# EAGLE board full1.2 (EAGLE 6.6.0)

Size 91.44 x 41.91 mm. Coordinates in mm from the lower left corner, seen from the top.
Outline: 0,0 91.44,0 91.44,0.64 91.44,31.75 60.33,31.75 60.33,41.91 0,41.91 0,0.64 0,0
Outline: circle at 15.88,10.16 radius 3.17
Outline: circle at 15.88,35.56 radius 3.17
Outline: circle at 55.56,35.56 radius 3.17
Outline: circle at 55.56,10.16 radius 3.17
Copper layers (1*16): Top 0.035mm / dielectric 1.5mm / Bottom 0.035mm
Design rules "default": minimum track width 10mil, minimum drill 24mil, track to track 8mil, track to pad 8mil, pad to pad 8mil, via to via 8mil, smd to smd 8mil, copper to edge 40mil, drill to drill 8mil, minimum pad ring 10mil, minimum via ring 8mil, stop-mask expansion 4mil, vias tented up to drill 0mil, thermal gap 10mil

## Footprints (pad centres in the part's own frame; a part is rotated, then mirrored left to right if it is on the bottom)
DIL16 = drill 0.813 long: 1 -8.89,-3.81; 2 -6.35,-3.81; 3 -3.81,-3.81; 4 -1.27,-3.81; 5 1.27,-3.81; 6 3.81,-3.81; 7 6.35,-3.81; 8 8.89,-3.81; 9 8.89,3.81; 10 6.35,3.81; 11 3.81,3.81; 12 1.27,3.81; 13 -1.27,3.81; 14 -3.81,3.81; 15 -6.35,3.81; 16 -8.89,3.81
SQUARE = drill 0.7 square: 1 0,0
OCTOGON = drill 0.7 octagon: 1 0,0
LONG = drill 0.7 long: 1 0,0
050X030_050_3 = drill 0.7: 1 -3.81,0; 2 3.81,0
DO35-2 = drill 0.9: A 2.54,0 | drill 0.9 square: C -2.54,0
1X05 = drill 1.016 long: 1 -5.08,0; 2 -2.54,0; 3 0,0; 4 2.54,0; 5 5.08,0
1X04 = drill 1.016 long: 1 -3.81,0; 2 -1.27,0; 3 1.27,0; 4 3.81,0
1X02 = drill 1.016 long: 1 -1.27,0; 2 1.27,0
1X01 = drill 1.016 octagon: 1 0,0
N20 = drill 0.813 long: 1 -11.435,-3.81; 2 -8.895,-3.81; 3 -6.355,-3.81; 4 -3.815,-3.81; 5 -1.275,-3.81; 6 1.265,-3.81; 7 3.805,-3.81; 8 6.345,-3.81; 9 8.885,-3.81; 10 11.425,-3.81; 11 11.425,3.81; 12 8.885,3.81; 13 6.345,3.81; 14 3.805,3.81; 15 1.265,3.81; 16 -1.275,3.81; 17 -3.815,3.81; 18 -6.355,3.81; 19 -8.895,3.81; 20 -11.435,3.81
TO92- = drill 0.7 octagon: 1 2.54,0; 2 0,0; 3 -2.54,0
R0207/3 = drill 0.7: 1 -3.81,0; 2 3.81,0

## Placement (x,y rotation side)
595LSB  74LS595N  [DIL16]  -52.07,6.35 0 top  (outside the outline)
595MSB  74LS595N  [DIL16]  -74.93,6.35 0 top  (outside the outline)
_RST  [SQUARE]  -64.77,83.82 0 top  (outside the outline)
A_AN  [SQUARE]  -35.56,81.28 0 top  (outside the outline)
A_R  [OCTOGON]  -48.26,88.9 0 top  (outside the outline)
AGND  [SQUARE]  -46.99,78.74 0 top  (outside the outline)
B_AN  [SQUARE]  -43.18,81.28 0 top  (outside the outline)
B_R  [OCTOGON]  -54.61,88.9 0 top  (outside the outline)
BACK  [OCTOGON]  -64.77,78.74 0 top  (outside the outline)
BATT+  [LONG]  -82.55,68.58 0 top  (outside the outline)
BATT-  [LONG]  -50.8,73.66 0 top  (outside the outline)
C1  100n  [050X030_050_3]  -76.2,39.37 0 top  (outside the outline)
C2  100n  [050X030_050_3]  -17.78,45.72 0 top  (outside the outline)
C3  100n  [050X030_050_3]  -27.94,45.72 0 top  (outside the outline)
C4  100n  [050X030_050_3]  -38.1,45.72 0 top  (outside the outline)
C5  100n  [050X030_050_3]  -48.26,45.72 0 top  (outside the outline)
D1  1N4148-2  [DO35-2]  -64.77,45.72 0 top  (outside the outline)
D2  1N4148-2  [DO35-2]  -74.93,45.72 0 top  (outside the outline)
D3  1N4148-2  [DO35-2]  -19.05,50.8 0 top  (outside the outline)
D4  1N4148-2  [DO35-2]  -29.21,50.8 0 top  (outside the outline)
D4_A  [SQUARE]  -72.39,83.82 0 top  (outside the outline)
D4_B  [SQUARE]  -80.01,83.82 0 top  (outside the outline)
D5  1N4148-2  [DO35-2]  -39.37,50.8 0 top  (outside the outline)
D5_A  [SQUARE]  -19.05,86.36 0 top  (outside the outline)
D5_B  [SQUARE]  -26.67,86.36 0 top  (outside the outline)
D6  1N4148-2  [DO35-2]  -49.53,50.8 0 top  (outside the outline)
D7  1N4148-2  [DO35-2]  -59.69,50.8 0 top  (outside the outline)
D8  1N4148-2  [DO35-2]  -69.85,50.8 0 top  (outside the outline)
D9  1N4148-2  [DO35-2]  -80.01,50.8 0 top  (outside the outline)
D10  1N4148-2  [DO35-2]  -19.05,55.88 0 top  (outside the outline)
D11  1N4148-2  [DO35-2]  -29.21,55.88 0 top  (outside the outline)
D12  1N4148-2  [DO35-2]  -39.37,55.88 0 top  (outside the outline)
D_AN  [SQUARE]  -20.32,81.28 0 top  (outside the outline)
D_DN  [SQUARE]  -73.66,78.74 0 top  (outside the outline)
D_LF  [OCTOGON]  -49.53,86.36 0 top  (outside the outline)
D_R  [OCTOGON]  -26.67,88.9 0 top  (outside the outline)
D_RT  [OCTOGON]  -50.8,81.28 0 top  (outside the outline)
D_UP  [OCTOGON]  -27.94,81.28 0 top  (outside the outline)
E1_AN  [SQUARE]  -66.04,76.2 0 top  (outside the outline)
E1_R  [OCTOGON]  -34.29,86.36 0 top  (outside the outline)
E6_AN  [SQUARE]  -74.93,76.2 0 top  (outside the outline)
E6_R  [SQUARE]  -41.91,86.36 0 top  (outside the outline)
G_AN  [SQUARE]  -82.55,78.74 0 top  (outside the outline)
G_R  [OCTOGON]  -80.01,86.36 0 top  (outside the outline)
GND  [SQUARE]  -57.15,86.36 0 top  (outside the outline)
GND_  [OCTOGON]  -55.88,78.74 0 top  (outside the outline)
JP1  [1X05]  -45.72,31.75 0 top  (outside the outline)
JP2  [1X05]  -59.69,31.75 0 top  (outside the outline)
JP3  [1X05]  -73.66,31.75 0 top  (outside the outline)
JP4  [1X05]  -20.32,38.1 0 top  (outside the outline)
JP5  [1X05]  -34.29,38.1 0 top  (outside the outline)
JP6  [1X04]  -46.99,38.1 0 top  (outside the outline)
JP7  [1X04]  -58.42,38.1 0 top  (outside the outline)
JP8  [1X02]  -67.31,38.1 0 top  (outside the outline)
JP9  [1X01]  -55.88,43.18 0 top  (outside the outline)
M_F1  [OCTOGON]  -58.42,81.28 0 top  (outside the outline)
M_F2  [OCTOGON]  -66.04,81.28 0 top  (outside the outline)
M_F3  [OCTOGON]  -73.66,81.28 0 top  (outside the outline)
M_F4  [SQUARE]  -81.28,81.28 0 top  (outside the outline)
M_F5  [OCTOGON]  -19.05,83.82 0 top  (outside the outline)
M_F6  [OCTOGON]  -26.67,83.82 0 top  (outside the outline)
M_F7  [OCTOGON]  -34.29,83.82 0 top  (outside the outline)
M_F8  [SQUARE]  -41.91,83.82 0 top  (outside the outline)
M_F9  [OCTOGON]  -49.53,83.82 0 top  (outside the outline)
M_F10  [OCTOGON]  -83.82,76.2 0 top  (outside the outline)
M_F11  [OCTOGON]  -20.32,78.74 0 top  (outside the outline)
M_F12  [OCTOGON]  -29.21,78.74 0 top  (outside the outline)
MSP430G2553  G2XX3---N20  [N20]  -26.67,6.35 0 top  (outside the outline)
MUX05  [SQUARE]  -71.12,73.66 0 top  (outside the outline)
MUX07  [SQUARE]  -80.01,73.66 0 top  (outside the outline)
MUX09  [SQUARE]  -21.59,76.2 0 top  (outside the outline)
MUX_08  [SQUARE]  -21.59,73.66 0 top  (outside the outline)
MUX_16  [SQUARE]  -31.75,73.66 0 top  (outside the outline)
MUX_17  [SQUARE]  -41.91,73.66 0 top  (outside the outline)
MUXA  4051N  [DIL16]  -24.13,22.86 0 top  (outside the outline)
MUXB  4051N  [DIL16]  -46.99,22.86 0 top  (outside the outline)
ORNG  [OCTOGON]  -38.1,78.74 0 top  (outside the outline)
POT_A  [OCTOGON]  -30.48,76.2 0 top  (outside the outline)
POT_B  [SQUARE]  -39.37,76.2 0 top  (outside the outline)
Q1  2N3904  [TO92-]  -64.77,20.32 0 top  (outside the outline)
Q2  2N3904  [TO92-]  -73.66,20.32 0 top  (outside the outline)
Q3  2N3904  [TO92-]  -82.55,20.32 0 top  (outside the outline)
Q4  2N3904  [TO92-]  -17.78,33.02 0 top  (outside the outline)
Q5  2N3904  [TO92-]  -26.67,33.02 0 top  (outside the outline)
Q6  2N3904  [TO92-]  -35.56,33.02 0 top  (outside the outline)
R1  300k  [R0207/3]  -48.26,55.88 0 top  (outside the outline)
R2  1k  [R0207/3]  -58.42,55.88 0 top  (outside the outline)
R3  300k  [R0207/3]  -68.58,55.88 0 top  (outside the outline)
R4  1k  [R0207/3]  -78.74,55.88 0 top  (outside the outline)
R5  300k  [R0207/3]  -17.78,60.96 0 top  (outside the outline)
R6  1k  [R0207/3]  -27.94,60.96 0 top  (outside the outline)
R7  300k  [R0207/3]  -38.1,60.96 0 top  (outside the outline)
R8  1k  [R0207/3]  -48.26,60.96 0 top  (outside the outline)
R9  300k  [R0207/3]  -58.42,60.96 0 top  (outside the outline)
R10  1k  [R0207/3]  -68.58,60.96 0 top  (outside the outline)
R11  300k  [R0207/3]  -78.74,60.96 0 top  (outside the outline)
R12  1k  [R0207/3]  -17.78,66.04 0 top  (outside the outline)
R13  30k  [R0207/3]  -27.94,66.04 0 top  (outside the outline)
R14  30k  [R0207/3]  -38.1,66.04 0 top  (outside the outline)
R15  30k  [R0207/3]  -48.26,66.04 0 top  (outside the outline)
R16  30k  [R0207/3]  -58.42,66.04 0 top  (outside the outline)
R17  30k  [R0207/3]  -68.58,66.04 0 top  (outside the outline)
R18  30k  [R0207/3]  -78.74,66.04 0 top  (outside the outline)
R19  30k  [R0207/3]  -17.78,71.12 0 top  (outside the outline)
R20  30k  [R0207/3]  -27.94,71.12 0 top  (outside the outline)
R21  30k  [R0207/3]  -38.1,71.12 0 top  (outside the outline)
R22  30k  [R0207/3]  -48.26,71.12 0 top  (outside the outline)
R23  30k  [R0207/3]  -58.42,71.12 0 top  (outside the outline)
R24  30k  [R0207/3]  -68.58,71.12 0 top  (outside the outline)
RXD  [SQUARE]  -64.77,86.36 0 top  (outside the outline)
SCL  [SQUARE]  -60.96,88.9 0 top  (outside the outline)
SDA  [OCTOGON]  -19.05,88.9 0 top  (outside the outline)
SIDE_B  [OCTOGON]  -62.23,73.66 0 top  (outside the outline)
START  [OCTOGON]  -48.26,76.2 0 top  (outside the outline)
TEST  [OCTOGON]  -57.15,83.82 0 top  (outside the outline)
TXD  [OCTOGON]  -34.29,88.9 0 top  (outside the outline)
VDD  [OCTOGON]  -72.39,86.36 0 top  (outside the outline)
VSS  [OCTOGON]  -41.91,88.9 0 top  (outside the outline)
X  [OCTOGON]  -66.04,88.9 0 top  (outside the outline)
X_BUT  [OCTOGON]  -57.15,76.2 0 top  (outside the outline)
Y  [SQUARE]  -71.12,88.9 0 top  (outside the outline)

## Library data of the parts
595LSB 595MSB = 74xx-us
_RST A_AN A_R AGND B_AN B_R BACK BATT+ BATT- D4_A D4_B D5_A D5_B D_AN D_DN D_LF D_R D_RT D_UP E1_AN E1_R E6_AN E6_R G_AN G_R GND GND_ M_F1-M_F12 MUX05 MUX07 MUX09 MUX_08 MUX_16 MUX_17 ORNG POT_A POT_B RXD SCL SDA SIDE_B START TEST TXD VDD VSS X X_BUT Y = gm-supply
C1-C5 = gm-caps-ceramic
D1-D12 = gm-diodes
JP1-JP9 = pinhead
MSP430G2553 = TI_MSP430_v16
MUXA MUXB = 40xx
Q1-Q6 = gm-trans
R1-R24 = gm-resistors

## Nets
_RST: _RST.1 MSP430G2553.16
A_AN: A_AN.1 MUXB.2
A_IN: MSP430G2553.2 MUXA.3 MUXB.3
B_AN: B_AN.1 MUXB.12
BACK: BACK.1 R18.1
D0: E6_R.1 MSP430G2553.5 Q3.1
D1: A_R.1 MSP430G2553.6 Q2.1
D2: D_R.1 MSP430G2553.7 Q1.1
D3: G_R.1 MSP430G2553.8 Q6.1
D4: B_R.1 MSP430G2553.9 Q5.1
D5: E1_R.1 MSP430G2553.10 Q4.1
D_AN: D_AN.1 MUXB.5
D_DOWN: D_DN.1 R22.1
D_LEFT: R20.1
D_RIGHT: D_RT.1 R21.1
D_UP: D_UP.1 R19.1
E1_AN: E1_AN.1 MUXB.15
E6_AN: E6_AN.1 MUXB.4
G_AN: G_AN.1 MUXB.1
GND: 595LSB.8 595LSB.13 595MSB.8 595MSB.13 BATT-.1 C1.2 C2.2 C3.2 C4.2 C5.2 GND.1 GND_.1 MSP430G2553.20 MUXA.7 MUXA.8 MUXB.7 MUXB.8 Q1.3 Q2.3 Q3.3 Q4.3 Q5.3 Q6.3 R1.2 R3.2 R5.2 R7.2 R9.2 R11.2 VSS.1
INH_A: MSP430G2553.18 MUXA.6
INH_B: MSP430G2553.19 MUXB.6
JOY_X: MUXA.4 X.1
JOY_Y: MUXA.2 Y.1
MUX05: MUX05.1 MUXA.12
MUX07: MUX07.1 MUXA.15
MUX08: MUX_08.1 MUXA.14
MUX09: MUX09.1 MUXA.13
MUX16: MUX_16.1 MUXB.14
MUX17: MUX_17.1 MUXB.13
N$1: 595LSB.14 595MSB.9
N$2: Q2.2 R3.1 R4.2
N$3: D3.A R15.2
N$4: D5.C D9.C R4.1
N$5: Q3.2 R5.1 R6.2
N$6: Q1.2 R1.1 R2.2
N$7: D6.C D8.C R2.1
N$8: D4.A R16.2
N$9: D5.A R17.2
N$10: D4.C D7.C R6.1
N$11: Q4.2 R7.1 R8.2
N$12: D6.A R18.2
N$13: D3.C D12.C R8.1
N$14: Q5.2 R9.1 R10.2
N$15: D1.A R13.2
N$16: M_F7.1
N$17: D2.C D11.C R10.1
N$18: Q6.2 R11.1 R12.2
N$19: D2.A R14.2
N$20: D1.C D10.C R12.1
N$21: D7.A R19.2
N$22: D8.A R20.2
N$23: D9.A R21.2
N$24: D10.A R22.2
N$25: D4_B.1 R14.1
N$26: D5_B.1 R15.1
N$27: D11.A R23.2
N$28: M_F3.1
N$29: D12.A R24.2
N$30: D4_A.1 R23.1
N$31: D5_A.1 R24.1
N$48: AGND.1
N$60: POT_A.1
N$66: D_LF.1
ORNG: ORNG.1
POT_A: MUXA.5
POT_B: MUXA.1 POT_B.1
RCK: 595LSB.12 595MSB.12 MSP430G2553.13
RXD: MSP430G2553.3 RXD.1
SCK: 595LSB.11 595MSB.11 MSP430G2553.12
SCL: MSP430G2553.14 SCL.1
SDA: MSP430G2553.15 SDA.1
SER: 595MSB.14 MSP430G2553.11
SIDE_B: SIDE_B.1
SIDE_BUTTON: R17.1
SR0: 595LSB.7 MUXA.11 MUXB.11
SR1: 595LSB.6 MUXA.10 MUXB.10
SR2: 595LSB.5 MUXA.9 MUXB.9
SR3: 595LSB.4
SR4: 595LSB.3 M_F12.1
SR5: 595LSB.2 M_F11.1
SR6: 595LSB.1 M_F10.1
SR7: 595LSB.15 M_F9.1
SR8: 595MSB.7 M_F8.1
SR9: 595MSB.6
SR10: 595MSB.5 M_F6.1
SR11: 595MSB.4 M_F5.1
SR12: 595MSB.3 M_F4.1
SR13: 595MSB.2
SR14: 595MSB.1 M_F2.1
SR15: 595MSB.15 M_F1.1
START: R13.1 START.1
TEST: MSP430G2553.17 TEST.1
TXD: MSP430G2553.4 TXD.1
VA: 595LSB.10 595LSB.16 595MSB.10 595MSB.16 BATT+.1 C1.1 C2.1 C3.1 C4.1 C5.1 MSP430G2553.1 MUXA.16 MUXB.16 VDD.1
X_BUTTON: R16.1 X_BUT.1

## Tracks (layer width: path | path; a pad name or v marks a point on that pad's centre or on a via)
_RST  (1 unrouted)
A_AN  (1 unrouted)
A_IN  (2 unrouted)
B_AN  (1 unrouted)
BACK  (1 unrouted)
D0  (2 unrouted)
D1  (2 unrouted)
D2  (2 unrouted)
D3  (2 unrouted)
D4  (2 unrouted)
D5  (2 unrouted)
D_AN  (1 unrouted)
D_DOWN  (1 unrouted)
D_RIGHT  (1 unrouted)
D_UP  (1 unrouted)
E1_AN  (1 unrouted)
E6_AN  (1 unrouted)
G_AN  (1 unrouted)
GND  (29 unrouted)
INH_A  (1 unrouted)
INH_B  (1 unrouted)
JOY_X  (1 unrouted)
JOY_Y  (1 unrouted)
MUX05  (1 unrouted)
MUX07  (1 unrouted)
MUX08  (1 unrouted)
MUX09  (1 unrouted)
MUX16  (1 unrouted)
MUX17  (1 unrouted)
N$1  (1 unrouted)
N$2  (2 unrouted)
N$3  (1 unrouted)
N$4  (2 unrouted)
N$5  (2 unrouted)
N$6  (2 unrouted)
N$7  (2 unrouted)
N$8  (1 unrouted)
N$9  (1 unrouted)
N$10  (2 unrouted)
N$11  (2 unrouted)
N$12  (1 unrouted)
N$13  (2 unrouted)
N$14  (2 unrouted)
N$15  (1 unrouted)
N$17  (2 unrouted)
N$18  (2 unrouted)
N$19  (1 unrouted)
N$20  (2 unrouted)
N$21  (1 unrouted)
N$22  (1 unrouted)
N$23  (1 unrouted)
N$24  (1 unrouted)
N$25  (1 unrouted)
N$26  (1 unrouted)
N$27  (1 unrouted)
N$29  (1 unrouted)
N$30  (1 unrouted)
N$31  (1 unrouted)
POT_B  (1 unrouted)
RCK  (2 unrouted)
RXD  (1 unrouted)
SCK  (2 unrouted)
SCL  (1 unrouted)
SDA  (1 unrouted)
SER  (1 unrouted)
SR0  (2 unrouted)
SR1  (2 unrouted)
SR2  (2 unrouted)
SR4  (1 unrouted)
SR5  (1 unrouted)
SR6  (1 unrouted)
SR7  (1 unrouted)
SR8  (1 unrouted)
SR10  (1 unrouted)
SR11  (1 unrouted)
SR12  (1 unrouted)
SR14  (1 unrouted)
SR15  (1 unrouted)
START  (1 unrouted)
TEST  (1 unrouted)
TXD  (1 unrouted)
VA  (13 unrouted)
X_BUTTON  (1 unrouted)